# EAGLE board SimulatorT2PowerRevD_panel4b (EAGLE 7.7.0)
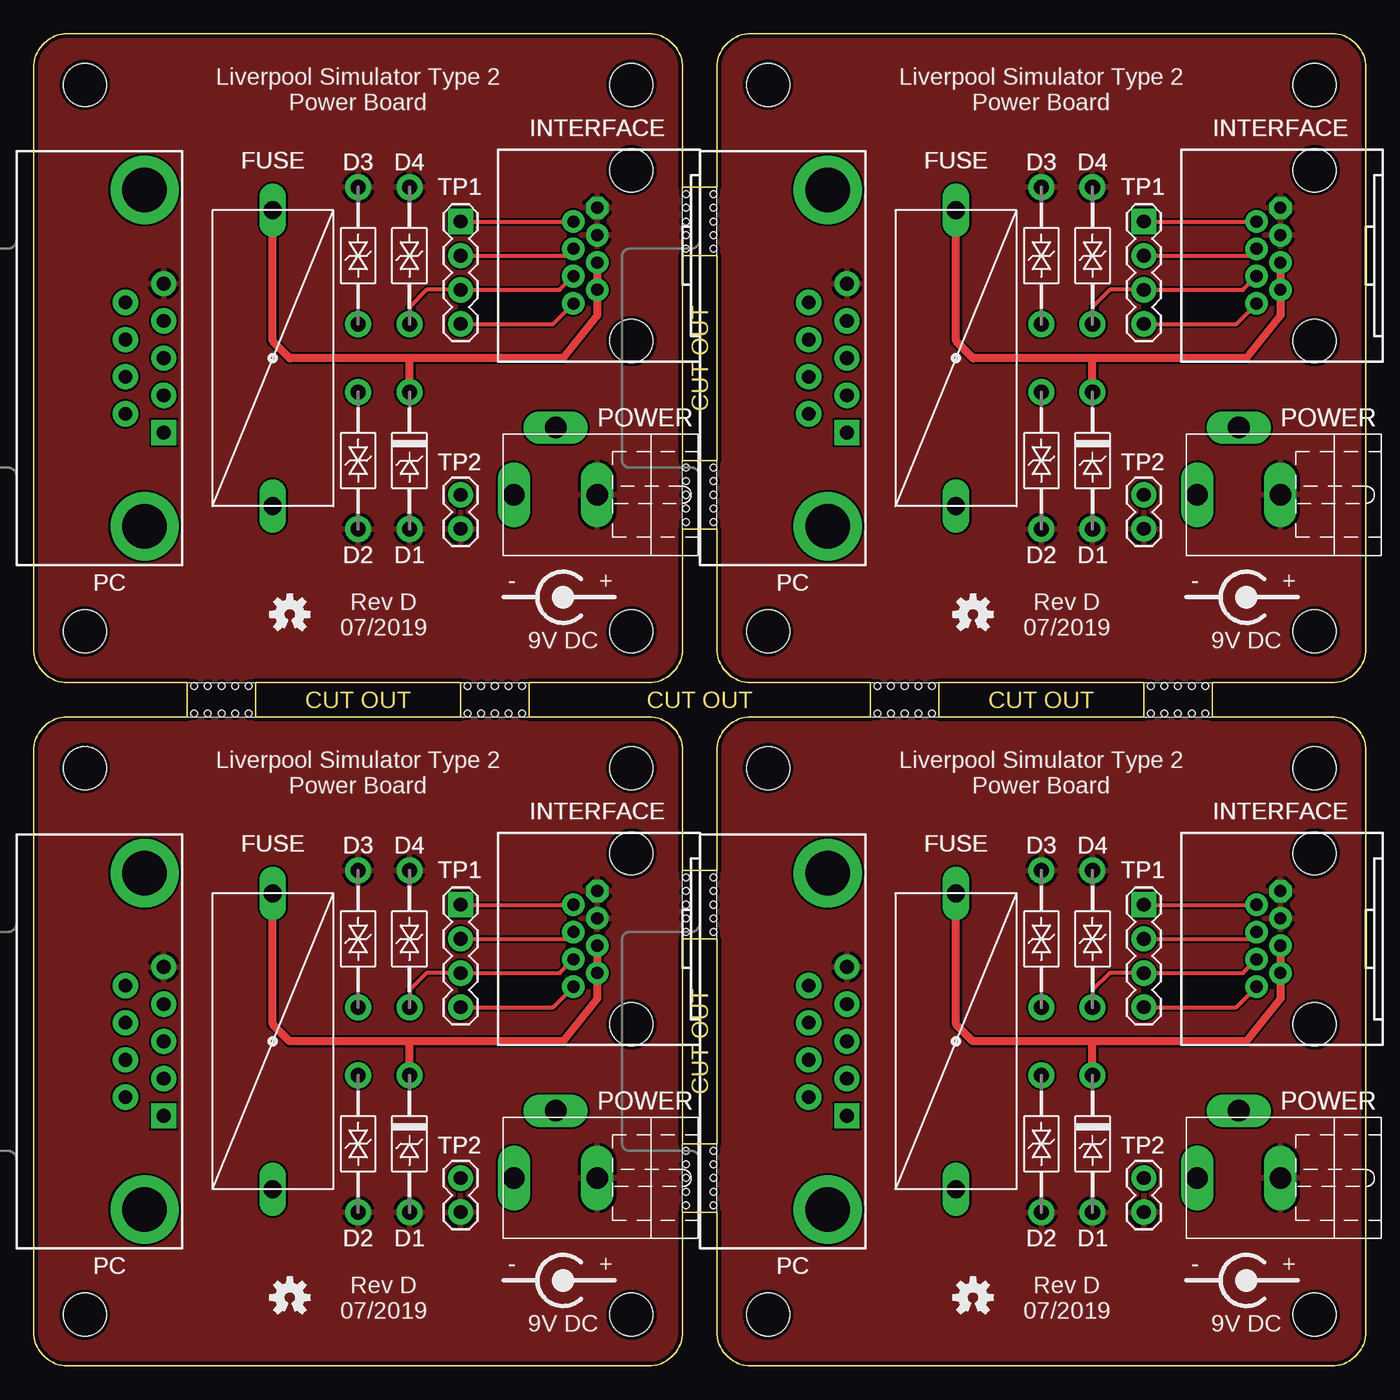
[diagram p0: board, top side]
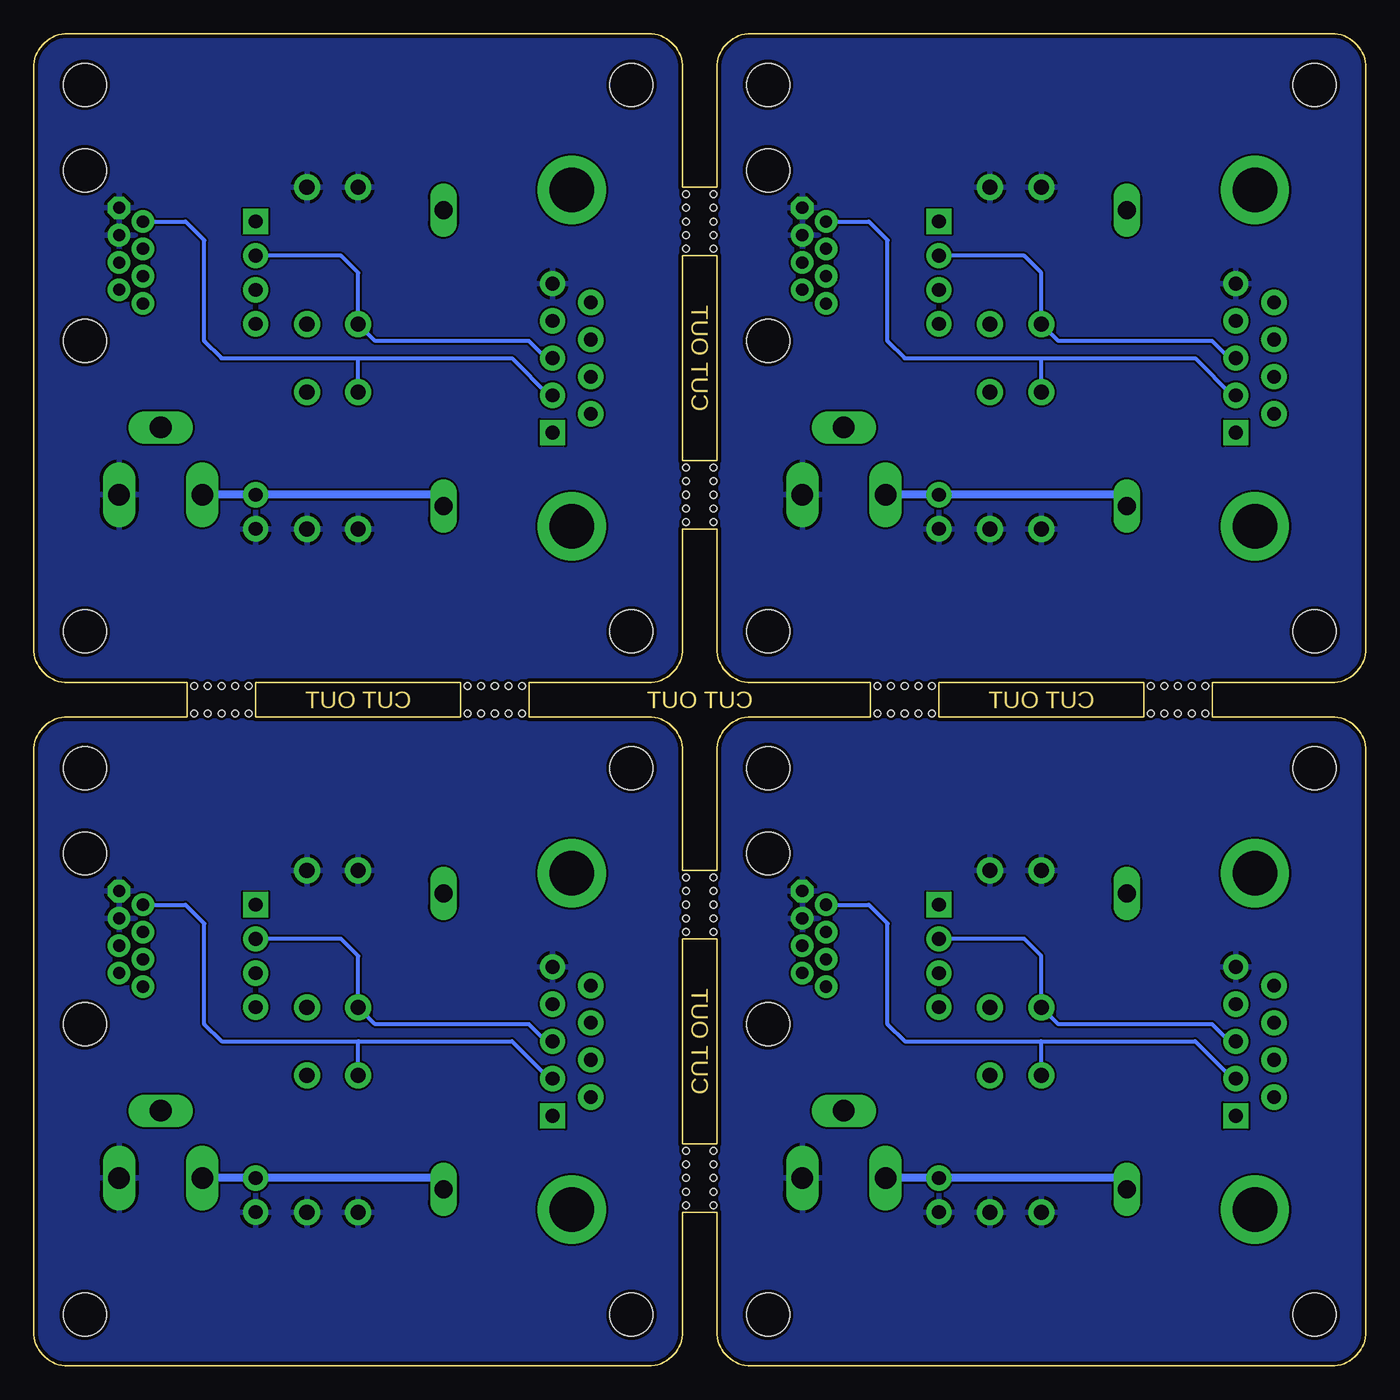
[diagram p1: board, bottom side, seen from below]

Size 99.06 x 99.06 mm. Coordinates in mm from the lower left corner, seen from the top.
Copper layers (1*16): Top 0.035mm / dielectric 1.5mm / Bottom 0.035mm
Design rules "SeeedStudio_2layer_DRU_no_angle_20140221": minimum track width 6mil, minimum drill 12mil, track to track 6mil, track to pad 6mil, pad to pad 6mil, via to via 6mil, smd to smd 0mil, copper to edge 10mil, drill to drill 10mil, minimum pad ring 10mil, minimum via ring 6mil, stop-mask expansion 2mil, vias tented up to drill 100mil, thermal gap 10mil
Holes 3.2 mm at 3.81,3.81 3.81,44.45 44.45,44.45 44.45,3.81 54.61,3.81 54.61,44.45 95.25,44.45 95.25,3.81 3.81,54.61 3.81,95.25 44.45,95.25 44.45,54.61 54.61,54.61 54.61,95.25 95.25,95.25 95.25,54.61

## Footprints (pad centres in the part's own frame; a part is rotated, then mirrored left to right if it is on the bottom)
DO41_TVS_UNI = drill 1.118 pad 1.93: ANODE -5.08,0; CATHODE 5.08,0
DO41_TVS_BI = drill 1.118 pad 1.93: A 5.08,0; C -5.08,0
OUTLINE_PANEL_4_5MM = hole 0.5: 33.274,50.546; 34.29,50.546; 35.306,50.546; 64.77,48.514; 65.786,48.514; 63.754,48.514; 63.754,50.546; 64.77,50.546; 65.786,50.546; 50.546,85.09; 50.546,86.106; 50.546,84.074; 48.514,85.09; 48.514,86.106; 36.322,50.546; 32.258,50.546; 12.954,50.546; 13.97,50.546; 14.986,50.546; 16.002,50.546; 11.938,50.546; 62.738,50.546; 66.802,50.546; 62.738,48.514; 66.802,48.514; 34.29,48.514; 35.306,48.514; 33.274,48.514; 32.258,48.514; 36.322,48.514; 13.97,48.514; 14.986,48.514; 12.954,48.514; 11.938,48.514; 16.002,48.514; 85.09,48.514; 86.106,48.514; 84.074,48.514; 84.074,50.546; 85.09,50.546; 86.106,50.546; 83.058,50.546; 87.122,50.546; 83.058,48.514; 87.122,48.514; 50.546,83.058; 48.514,84.074; 48.514,83.058; 50.546,87.122; 48.514,87.122; 50.546,64.77; 50.546,65.786; 50.546,63.754; 48.514,64.77; 48.514,65.786; 50.546,62.738; 48.514,63.754; 48.514,62.738; 50.546,66.802; 48.514,66.802; 50.546,34.29; 50.546,35.306; 50.546,33.274; 48.514,34.29; 48.514,35.306; 50.546,32.258; 48.514,33.274; 48.514,32.258; 50.546,36.322; 48.514,36.322; 50.546,13.97; 50.546,14.986; 50.546,12.954; 48.514,13.97; 48.514,14.986; 50.546,11.938; 48.514,12.954; 48.514,11.938; 50.546,16.002; 48.514,16.002
MCOMP-FUSE-HOLDER-PCB = drill 1.321 long: 1 -11.001,0; 2 11.001,0
RJ45-RJHSE-5080 = drill 0.9 pad 1.676 octagon: 1 3.556,2.54 | drill 0.9 pad 1.676: 2 2.54,4.318; 3 1.524,2.54; 4 0.508,4.318; 5 -0.508,2.54; 6 -1.524,4.318; 7 -2.54,2.54; 8 -3.556,4.318 | hole 3.2: -6.35,0; 6.35,0
MULTICOMP-DB9-FEMALE-PCB-90DEG = drill 1.016 pad 1.88 square: 1 -5.54,-10.945 | drill 1.016 pad 1.88: 2 -2.77,-10.945; 3 0,-10.945; 4 2.77,-10.945; 5 5.54,-10.945; 6 -4.15,-8.105; 7 -1.38,-8.105; 8 1.38,-8.105; 9 4.15,-8.105 | drill 3.302 pad 5.08: G1 -12.496,-9.525; G2 12.496,-9.525
CLIFF-FC681465P-DC-JACK = drill 1.6 long: 1 6.2,0; 2 3.099,-5.001; 3 0,0
1X04 = drill 1.016 pad 1.88 square: 1 0,0 | drill 1.016 pad 1.88: 2 2.54,0; 3 5.08,0; 4 7.62,0
1X02 = drill 1.016 pad 1.88: 1 0,0; 2 2.54,0

## Placement (x,y rotation side)
D1  SA12A  [DO41_TVS_UNI]  27.94,16.51 90 top
D1_1  SA12A  [DO41_TVS_UNI]  78.74,16.51 90 top
D1_2  SA12A  [DO41_TVS_UNI]  27.94,67.31 90 top
D1_3  SA12A  [DO41_TVS_UNI]  78.74,67.31 90 top
D2  SA15CA  [DO41_TVS_BI]  24.13,16.51 270 top
D2_1  SA15CA  [DO41_TVS_BI]  74.93,16.51 270 top
D2_2  SA15CA  [DO41_TVS_BI]  24.13,67.31 270 top
D2_3  SA15CA  [DO41_TVS_BI]  74.93,67.31 270 top
D3  SA15CA  [DO41_TVS_BI]  24.13,31.75 90 top
D3_1  SA15CA  [DO41_TVS_BI]  74.93,31.75 90 top
D3_2  SA15CA  [DO41_TVS_BI]  24.13,82.55 90 top
D3_3  SA15CA  [DO41_TVS_BI]  74.93,82.55 90 top
D4  SA15CA  [DO41_TVS_BI]  27.94,31.75 90 top
D4_1  SA15CA  [DO41_TVS_BI]  78.74,31.75 90 top
D4_2  SA15CA  [DO41_TVS_BI]  27.94,82.55 90 top
D4_3  SA15CA  [DO41_TVS_BI]  78.74,82.55 90 top
E$2  [OUTLINE_PANEL_4_5MM]  0,0 0 top
FUSE  800mA  [MCOMP-FUSE-HOLDER-PCB]  17.78,24.13 270 top
FUSE_1  800mA  [MCOMP-FUSE-HOLDER-PCB]  68.58,24.13 270 top
FUSE_2  800mA  [MCOMP-FUSE-HOLDER-PCB]  17.78,74.93 270 top
FUSE_3  800mA  [MCOMP-FUSE-HOLDER-PCB]  68.58,74.93 270 top
INTERFACE  RJ45-RJHSE-X08090DEG  [RJ45-RJHSE-5080]  44.45,31.75 90 top
INTERFACE_1  RJ45-RJHSE-X08090DEG  [RJ45-RJHSE-5080]  95.25,31.75 90 top
INTERFACE_2  RJ45-RJHSE-X08090DEG  [RJ45-RJHSE-5080]  44.45,82.55 90 top
INTERFACE_3  RJ45-RJHSE-X08090DEG  [RJ45-RJHSE-5080]  95.25,82.55 90 top
LOGO1  OSHW-LOGOS  [OSHW-LOGO-S]  19.05,5.08 0 top
LOGO1_1  OSHW-LOGOS  [OSHW-LOGO-S]  69.85,5.08 0 top
LOGO1_2  OSHW-LOGOS  [OSHW-LOGO-S]  19.05,55.88 0 top
LOGO1_3  OSHW-LOGOS  [OSHW-LOGO-S]  69.85,55.88 0 top
PC  [MULTICOMP-DB9-FEMALE-PCB-90DEG]  -1.27,24.13 90 top
PC_1  [MULTICOMP-DB9-FEMALE-PCB-90DEG]  49.53,24.13 90 top
PC_2  [MULTICOMP-DB9-FEMALE-PCB-90DEG]  -1.27,74.93 90 top
PC_3  [MULTICOMP-DB9-FEMALE-PCB-90DEG]  49.53,74.93 90 top
POWER  9V DC  [CLIFF-FC681465P-DC-JACK]  41.91,13.97 180 top
POWER_1  9V DC  [CLIFF-FC681465P-DC-JACK]  92.71,13.97 180 top
POWER_2  9V DC  [CLIFF-FC681465P-DC-JACK]  41.91,64.77 180 top
POWER_3  9V DC  [CLIFF-FC681465P-DC-JACK]  92.71,64.77 180 top
TP1  [1X04]  31.75,34.29 270 top
TP1_1  [1X04]  82.55,34.29 270 top
TP1_2  [1X04]  31.75,85.09 270 top
TP1_3  [1X04]  82.55,85.09 270 top
TP2  [1X02]  31.75,13.97 270 top
TP2_1  [1X02]  82.55,13.97 270 top
TP2_2  [1X02]  31.75,64.77 270 top
TP2_3  [1X02]  82.55,64.77 270 top
U$1  [CENTRE-POS-SILK]  39.37,6.35 0 top
U$1_1  [CENTRE-POS-SILK]  90.17,6.35 0 top
U$1_2  [CENTRE-POS-SILK]  39.37,57.15 0 top
U$1_3  [CENTRE-POS-SILK]  90.17,57.15 0 top

## Library data of the parts
D1-D4 E$2 FUSE INTERFACE PC POWER U$1 U$1_1-U$1_3 = AIC_Custom
D1_1-D1_3 = AIC_Custom; NAME1: D1
D2_1-D2_3 = AIC_Custom; NAME1: D2
D3_1-D3_3 = AIC_Custom; NAME1: D3
D4_1-D4_3 = AIC_Custom; NAME1: D4
FUSE_1-FUSE_3 = AIC_Custom; NAME1: FUSE
INTERFACE_1-INTERFACE_3 = AIC_Custom; NAME1: INTERFACE
LOGO1 LOGO1_1-LOGO1_3 = SparkFun-Aesthetics
PC_1-PC_3 = AIC_Custom; NAME1: PC
POWER_1-POWER_3 = AIC_Custom; NAME1: POWER
TP1 TP2 = SparkFun-Connectors
TP1_1-TP1_3 = SparkFun-Connectors; NAME1: TP1
TP2_1-TP2_3 = SparkFun-Connectors; NAME1: TP2

## Nets
GND: D1.ANODE D2.A D3.A D4.A INTERFACE.1 INTERFACE.3 PC.5 POWER.3 TP2.2
GND1: D1_1.ANODE D2_1.A D3_1.A D4_1.A INTERFACE_1.1 INTERFACE_1.3 PC_1.5 POWER_1.3 TP2_1.2
GND2: D1_2.ANODE D2_2.A D3_2.A D4_2.A INTERFACE_2.1 INTERFACE_2.3 PC_2.5 POWER_2.3 TP2_2.2
GND3: D1_3.ANODE D2_3.A D3_3.A D4_3.A INTERFACE_3.1 INTERFACE_3.3 PC_3.5 POWER_3.3 TP2_3.2
P8: INTERFACE.8 TP1.4
P81: INTERFACE_1.8 TP1_1.4
P82: INTERFACE_2.8 TP1_2.4
P83: INTERFACE_3.8 TP1_3.4
RXD: D3.C INTERFACE.4 PC.3 TP1.2
RXD1: D3_1.C INTERFACE_1.4 PC_1.3 TP1_1.2
RXD2: D3_2.C INTERFACE_2.4 PC_2.3 TP1_2.2
RXD3: D3_3.C INTERFACE_3.4 PC_3.3 TP1_3.2
TX2: D4.C INTERFACE.6 TP1.3
TX21: D4_1.C INTERFACE_1.6 TP1_1.3
TX22: D4_2.C INTERFACE_2.6 TP1_2.3
TX23: D4_3.C INTERFACE_3.6 TP1_3.3
TXD: D2.C INTERFACE.2 PC.2 TP1.1
TXD1: D2_1.C INTERFACE_1.2 PC_1.2 TP1_1.1
TXD2: D2_2.C INTERFACE_2.2 PC_2.2 TP1_2.1
TXD3: D2_3.C INTERFACE_3.2 PC_3.2 TP1_3.1
VIN: FUSE.2 POWER.1 TP2.1
VIN1: FUSE_1.2 POWER_1.1 TP2_1.1
VIN2: D1.CATHODE FUSE.1 INTERFACE.5 INTERFACE.7
VIN3: FUSE_2.2 POWER_2.1 TP2_2.1
VIN4: FUSE_3.2 POWER_3.1 TP2_3.1
VIN21: D1_1.CATHODE FUSE_1.1 INTERFACE_1.5 INTERFACE_1.7
VIN22: D1_2.CATHODE FUSE_2.1 INTERFACE_2.5 INTERFACE_2.7
VIN23: D1_3.CATHODE FUSE_3.1 INTERFACE_3.5 INTERFACE_3.7

## Tracks (layer width: path | path; a pad name or v marks a point on that pad's centre or on a via)
GND
  pour Bottom: 2.54,48.26 45.72,48.26 arc-90 48.26,45.72 48.26,2.54 arc-90 45.72,0 2.54,0 arc-90 0,2.54 0,45.72 arc-90
  pour Top: 2.54,48.26 45.72,48.26 arc-90 48.26,45.72 48.26,2.54 arc-90 45.72,0 2.54,0 arc-90 0,2.54 0,45.72 arc-90
GND1
  pour Bottom: 53.34,48.26 96.52,48.26 arc-90 99.06,45.72 99.06,2.54 arc-90 96.52,0 53.34,0 arc-90 50.8,2.54 50.8,45.72 arc-90
  pour Top: 53.34,48.26 96.52,48.26 arc-90 99.06,45.72 99.06,2.54 arc-90 96.52,0 53.34,0 arc-90 50.8,2.54 50.8,45.72 arc-90
GND2
  pour Bottom: 2.54,99.06 45.72,99.06 arc-90 48.26,96.52 48.26,53.34 arc-90 45.72,50.8 2.54,50.8 arc-90 0,53.34 0,96.52 arc-90
  pour Top: 2.54,99.06 45.72,99.06 arc-90 48.26,96.52 48.26,53.34 arc-90 45.72,50.8 2.54,50.8 arc-90 0,53.34 0,96.52 arc-90
GND3
  pour Bottom: 53.34,99.06 96.52,99.06 arc-90 99.06,96.52 99.06,53.34 arc-90 96.52,50.8 53.34,50.8 arc-90 50.8,53.34 50.8,96.52 arc-90
  pour Top: 53.34,99.06 96.52,99.06 arc-90 99.06,96.52 99.06,53.34 arc-90 96.52,50.8 53.34,50.8 arc-90 50.8,53.34 50.8,96.52 arc-90
P8
  Top 0.305: TP1.4 38.61,26.67 INTERFACE.8
P81
  Top 0.305: TP1_1.4 89.41,26.67 INTERFACE_1.8
P82
  Top 0.305: TP1_2.4 38.61,77.47 INTERFACE_2.8
P83
  Top 0.305: TP1_3.4 89.41,77.47 INTERFACE_3.8
RXD
  Top 0.305: TP1.2 39.62,31.75 INTERFACE.4
  Bottom 0.305: TP1.2 25.4,31.75 24.13,30.48 D3.C 22.86,25.4 11.43,25.4 10.16,24.13 PC.3
RXD1
  Top 0.305: TP1_1.2 90.42,31.75 INTERFACE_1.4
  Bottom 0.305: TP1_1.2 76.2,31.75 74.93,30.48 D3_1.C 73.66,25.4 62.23,25.4 60.96,24.13 PC_1.3
RXD2
  Top 0.305: TP1_2.2 39.62,82.55 INTERFACE_2.4
  Bottom 0.305: TP1_2.2 25.4,82.55 24.13,81.28 D3_2.C 22.86,76.2 11.43,76.2 10.16,74.93 PC_2.3
RXD3
  Top 0.305: TP1_3.2 90.42,82.55 INTERFACE_3.4
  Bottom 0.305: TP1_3.2 76.2,82.55 74.93,81.28 D3_3.C 73.66,76.2 62.23,76.2 60.96,74.93 PC_3.3
TX2
  Top 0.305: INTERFACE.6 39.12,29.21 TP1.3 29.21,29.21 27.94,27.94 D4.C
TX21
  Top 0.305: INTERFACE_1.6 89.92,29.21 TP1_1.3 80.01,29.21 78.74,27.94 D4_1.C
TX22
  Top 0.305: INTERFACE_2.6 39.12,80.01 TP1_2.3 29.21,80.01 27.94,78.74 D4_2.C
TX23
  Top 0.305: INTERFACE_3.6 89.92,80.01 TP1_3.3 80.01,80.01 78.74,78.74 D4_3.C
TXD
  Top 0.305: TP1.1 INTERFACE.2
  Bottom 0.305: INTERFACE.2 36.96,34.29 35.56,32.89 35.56,25.4 34.29,24.13 24.13,24.13 | 24.13,24.13 12.7,24.13 9.93,21.36 PC.2 | D2.C 24.13,24.13
TXD1
  Top 0.305: TP1_1.1 INTERFACE_1.2
  Bottom 0.305: INTERFACE_1.2 87.76,34.29 86.36,32.89 86.36,25.4 85.09,24.13 74.93,24.13 | 74.93,24.13 63.5,24.13 60.73,21.36 PC_1.2 | D2_1.C 74.93,24.13
TXD2
  Top 0.305: TP1_2.1 INTERFACE_2.2
  Bottom 0.305: INTERFACE_2.2 36.96,85.09 35.56,83.69 35.56,76.2 34.29,74.93 24.13,74.93 | 24.13,74.93 12.7,74.93 9.93,72.16 PC_2.2 | D2_2.C 24.13,74.93
TXD3
  Top 0.305: TP1_3.1 INTERFACE_3.2
  Bottom 0.305: INTERFACE_3.2 87.76,85.09 86.36,83.69 86.36,76.2 85.09,74.93 74.93,74.93 | 74.93,74.93 63.5,74.93 60.73,72.16 PC_3.2 | D2_3.C 74.93,74.93
VIN
  Bottom 0.61: POWER.1 TP2.1 18.62,13.97 FUSE.2
VIN1
  Bottom 0.61: POWER_1.1 TP2_1.1 69.42,13.97 FUSE_1.2
VIN2
  Top 0.61: INTERFACE.5 INTERFACE.7 41.91,27.3 39.37,24.13 27.94,24.13 | 27.94,24.13 19.05,24.13 17.78,25.4 FUSE.1 | D1.CATHODE 27.94,24.13
VIN3
  Bottom 0.61: POWER_2.1 TP2_2.1 18.62,64.77 FUSE_2.2
VIN4
  Bottom 0.61: POWER_3.1 TP2_3.1 69.42,64.77 FUSE_3.2
VIN21
  Top 0.61: INTERFACE_1.5 INTERFACE_1.7 92.71,27.3 90.17,24.13 78.74,24.13 | 78.74,24.13 69.85,24.13 68.58,25.4 FUSE_1.1 | D1_1.CATHODE 78.74,24.13
VIN22
  Top 0.61: INTERFACE_2.5 INTERFACE_2.7 41.91,78.11 39.37,74.93 27.94,74.93 | 27.94,74.93 19.05,74.93 17.78,76.2 FUSE_2.1 | D1_2.CATHODE 27.94,74.93
VIN23
  Top 0.61: INTERFACE_3.5 INTERFACE_3.7 92.71,78.11 90.17,74.93 78.74,74.93 | 78.74,74.93 69.85,74.93 68.58,76.2 FUSE_3.1 | D1_3.CATHODE 78.74,74.93

## Text on the board
tPlace: Liverpool Simulator Type 2 / Power Board | Liverpool Simulator Type 2 / Power Board | Rev D / 07/2019 | Rev D / 07/2019 | Liverpool Simulator Type 2 / Power Board | Liverpool Simulator Type 2 / Power Board | Rev D / 07/2019 | Rev D / 07/2019
_tNames: INTERFACE | INTERFACE | INTERFACE | INTERFACE | FUSE | FUSE | D3 | D3 | D4 | D4 | FUSE | FUSE | D3 | D3 | D4 | D4 | TP1 | TP1 | TP1 | TP1 | POWER | POWER | POWER | POWER | TP2 | TP2 | TP2 | TP2 | D2 | D2 | D1 | D1 | D2 | D2 | D1 | D1 | PC | PC | PC | PC | INTERFACE | INTERFACE | INTERFACE | INTERFACE | FUSE | FUSE | D3 | D3 | D4 | D4 | FUSE | FUSE | D3 | D3 | D4 | D4 | TP1 | TP1 | TP1 | TP1 | POWER | POWER | POWER | POWER | TP2 | TP2 | TP2 | TP2 | D2 | D2 | D1 | D1 | D2 | D2 | D1 | D1 | PC | PC | PC | PC